# Altium PCB PCB1.PcbDoc
Units mm, origin at the board's own origin, x right, y up, seen from the top; angles counter-clockwise.
Board outline 95 x 70 mm, 2 copper layers (Top Layer, Bottom Layer); 91 components, 64 nets, 292 pads, 0 vias.
Unrouted connection lines stored in the file: 193.
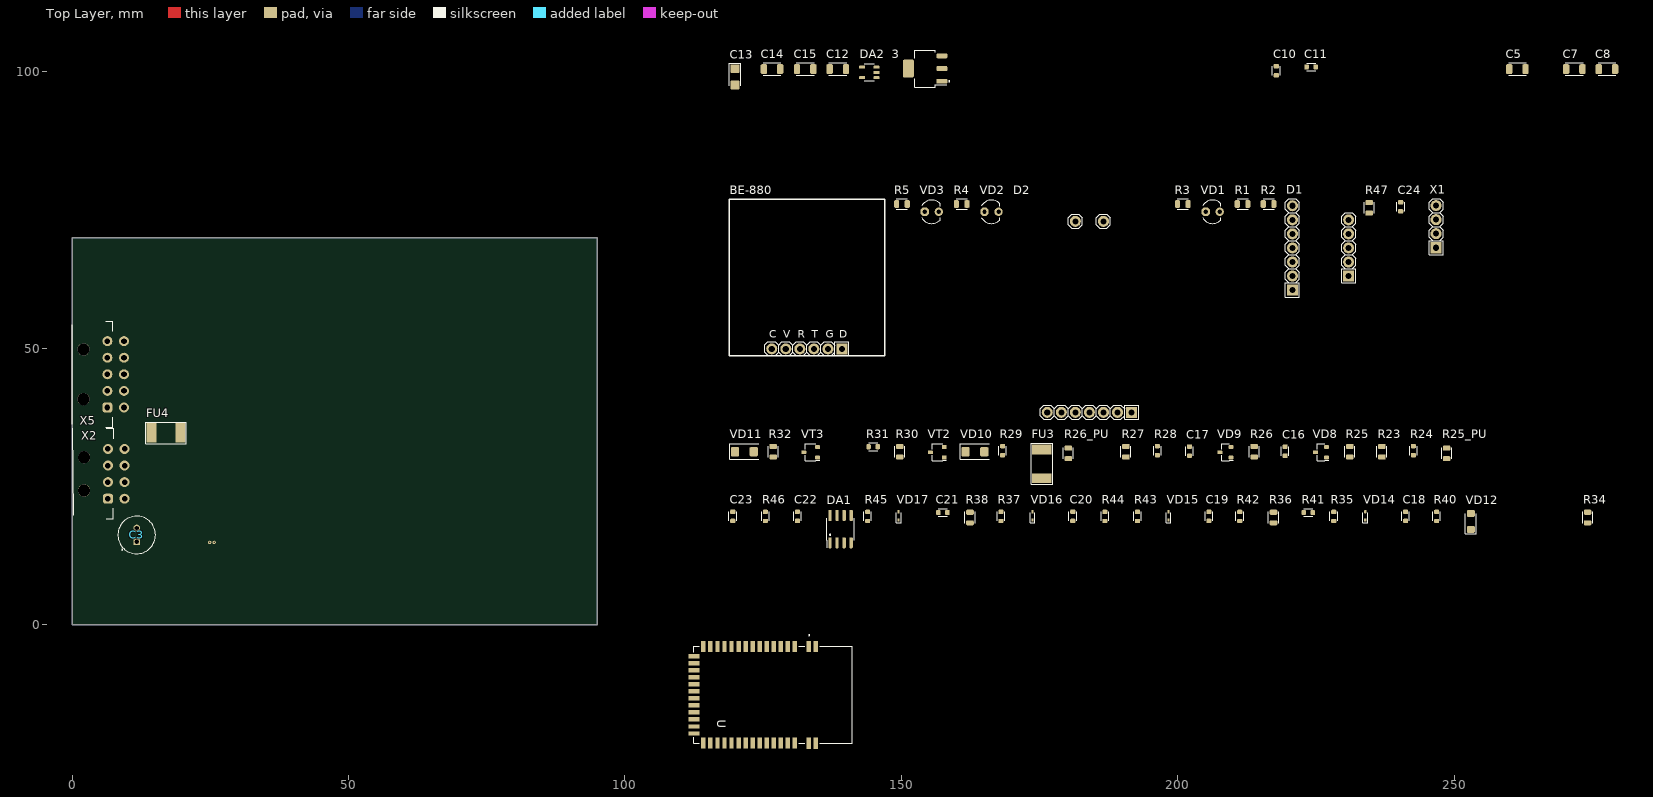
[diagram p0: Top Layer view]
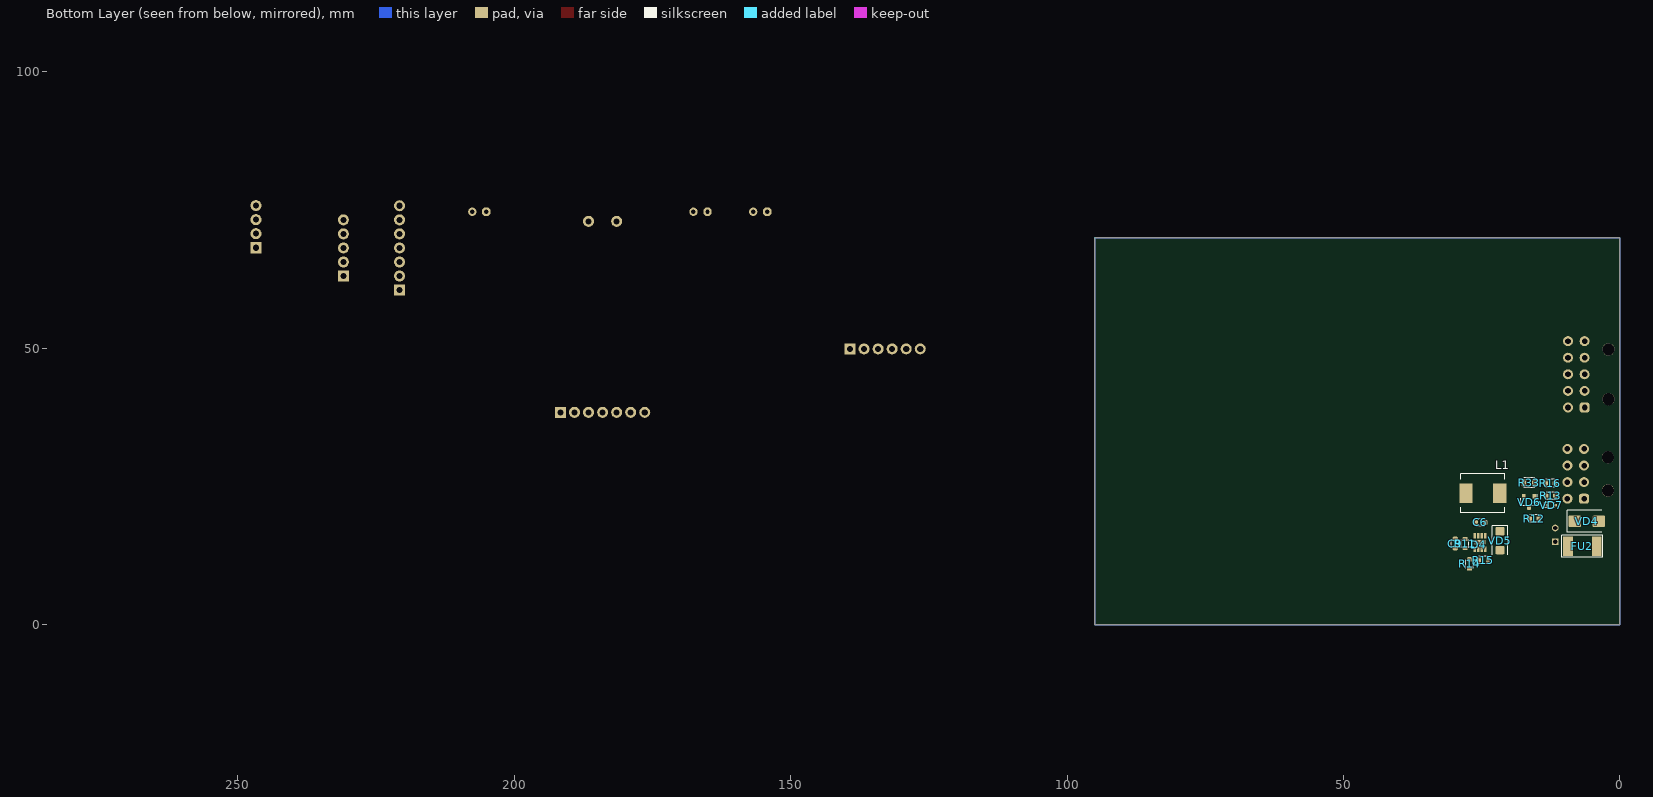
[diagram p1: Bottom Layer view, seen from below]

## Layer stack, top to bottom
Top Solder: solder mask 0.0102, Solder Resist, Dk 3.5
Top Layer: signal copper 0.0356
Dielectric 1: dielectric 0.32, FR-4, Dk 4.8
Bottom Layer: signal copper 0.0356
Bottom Solder: solder mask 0.0102, Solder Resist, Dk 3.5

## Board outline
0,0 0,70 95,70 95,0

## Design rules (kind name [scope] priority, off if disabled: settings)
Clearance "Clearance 3 Oz" [All] p1 off: gap=0.35 ignorepadtopadclearanceinfootprint=FALSE except(0.25: Arc-Hole Track-Hole SMDPad-Hole THPad-Hole Via-Hole Fill-Hole Poly-Hole Region-Hole Text-Hole)
Clearance "Clearance 2 Oz" [All] p2 off: gap=0.3 ignorepadtopadclearanceinfootprint=FALSE except(0.25: Arc-Hole Track-Hole SMDPad-Hole THPad-Hole Via-Hole Fill-Hole Poly-Hole Region-Hole Text-Hole)
Clearance "Clearance-1 1 Oz" [All] p3 off: gap=0.2 ignorepadtopadclearanceinfootprint=FALSE except(0.25: Arc-Hole Track-Hole SMDPad-Hole THPad-Hole Via-Hole Fill-Hole Poly-Hole Region-Hole Text-Hole) // Standart
Clearance "Clearance-2 1 Oz" [All] p4: gap=0.15 ignorepadtopadclearanceinfootprint=FALSE except(0.2: Arc-Fill Arc-Poly Track-Fill Track-Poly SMDPad-Fill SMDPad-Poly THPad-Fill THPad-Poly Via-Fill Via-Poly Fill-Fill Fill-Poly Poly-Poly; 0.25: Arc-Hole Track-Hole SMDPad-Hole THPad-Hole Via-Hole Fill-Hole Poly-Hole Region-Hole Text-Hole) // Advance
Clearance "Clearance-1 1/2 Oz" [All] p5 off: gap=0.125 ignorepadtopadclearanceinfootprint=FALSE except(0.2: Arc-Fill Arc-Poly Track-Fill Track-Poly SMDPad-SMDPad SMDPad-Fill SMDPad-Poly THPad-Fill THPad-Poly Via-Fill Via-Poly Fill-Fill Fill-Poly Poly-Poly Poly-Region Poly-Text; 0.25: Arc-Hole Track-Hole SMDPad-Hole THPad-Hole Via-Hole Fill-Hole Poly-Hole Region-Hole Text-Hole) // Standart
Clearance "Clearance-2 1/2 Oz" [All] p6 off: gap=0.1 ignorepadtopadclearanceinfootprint=FALSE except(0.15: Arc-Fill Arc-Poly Track-Fill Track-Poly SMDPad-SMDPad SMDPad-Fill SMDPad-Poly THPad-Fill THPad-Poly Via-Fill Via-Poly Fill-Fill Fill-Poly Poly-Poly Poly-Region Poly-Text; 0.25: Arc-Hole Track-Hole SMDPad-Hole THPad-Hole Via-Hole Fill-Hole Poly-Hole Region-Hole Text-Hole) // Advance
PolygonConnect [All] p1: connectstyle=Relief reliefconductorwidth=0.254 reliefentries=4 polygonreliefangle="90 Angle" airgapwidth=0.254
RoutingVias [All] p1: holewidth=0.711 width=1.27 viastyle="Through Hole" minholewidth=0.711 minwidth=1.27 maxholewidth=0.711 maxwidth=1.27
SilkToSilkClearance [All] p1 off: silktosilkclearance=0.254
SilkToSolderMaskClearance [IsPad] p1 off: minsilkscreentomaskgap=0.254 clearancetoexposedcopper=TRUE
SolderMaskExpansion [All] p1: expansion=0.102 istentingtop=FALSE
Width "Width 3 Oz" [All] p1 off: maxlimit=10 minlimit=0.35 preferedwidth=0.4 checkconnectedcopper=TRUE
Width "Width 2 Oz" [All] p2 off: maxlimit=10 minlimit=0.3 preferedwidth=0.35 minimp=50.000000 maximp=50.000000 favimp=50.000000 checkconnectedcopper=TRUE
Width "Width 1 Oz" [All] p3 off: maxlimit=10 minlimit=0.15 preferedwidth=0.2 checkconnectedcopper=TRUE
Width "Width 1/2 Oz" [All] p4: maxlimit=10 minlimit=0.1 preferedwidth=0.125 checkconnectedcopper=TRUE
28 further rules are at their usual default settings.

## Classes and differential pairs
component class RaceDAQ_POWER: 3 C3 C5 C6 C7 C8 C9 C10 C11 C12 C13 C14 C15 D4 DA2 FU2 L1 R11 R12 R13 R14 R15 R16 R33 VD4 VD5 VD6 VD7 X2
component class RaceDAQ_MCU: BE-880 C24 D1 D2 R1 R2 R3 R4 R5 R47 U VD1 VD2 VD3 X1
component class RaceDAQ_IN_OUT: C16 C17 FU3 FU4 R23 R24 R25 R25_PU R26 R26_PU R27 R28 R29 R30 R31 R32 VD8 VD9 VD10 VD11 VT2 VT3
component class RaceDAQ_ANALOG: C18 C19 C20 C21 C22 C23 DA1 R34 R35 R36 R37 R38 R40 R41 R42 R43 R44 R45 R46 VD12 VD14 VD15 VD16 VD17 X5

## Components (designator, comment, footprint, x,y, rotation, side; value= is the part's Value field where it differs from the comment)
3 "LM1117-3.3" SOT230P700X180-4L40N 154.3,100.6 r90 top
BE-880 "" GPS:BE880 132.9,49.9 r0 top
C3 "100uF" CAPPRD250W50D680H1250 11.7,16.25 r90 top
C5 "10uF" CAPC3216X130L50N 261.399,100.5 r0 top
C6 "0.1uF" CAPC1608X90L25N 25.225,18.5 r180 bottom
C7 "10uF" CAPC3216X130L50N 271.699,100.5 r0 top
C8 "10uF" CAPC3216X130L50N 277.599,100.5 r0 top
C9 "33пФ" CAPC1608X90L25N 29.8,14.7 r270 bottom
C10 "33пФ" CAPC1608X90L25N 217.8,100.2 r90 top
C11 "0.1uF" CAPC1608X90L25N 224.1,100.9 r0 top
C12 "10uF" CAPC3216X130L50N 138.5,100.5 r0 top
C13 "22uF" CAPPM3216X180 119.9,99.1 r90 top
C14 "10uF" CAPC3216X130L50N 126.6,100.5 r0 top
C15 "10uF" CAPC3216X130L50N 132.6,100.5 r0 top
C16 "4.7нФ" CAPC1608X90L25N 219.4,31.4 r90 top
C17 "4.7нФ" CAPC1608X90L25N 202.1,31.4 r90 top
C18 "0.1uF" CAPC1608X90L25N 241.199,19.6 r90 top
C19 "0.1uF" CAPC1608X90L25N 205.6,19.6 r90 top
C20 "0.1uF" CAPC1608X90L25N 181,19.6 r90 top
C21 "0.1uF" CAPC1608X90L25N 157.5,20.3 r0 top
C22 "0.1uF" CAPC1608X90L25N 131.2,19.6 r90 top
C23 "0.1uF" CAPC1608X90L25N 119.5,19.6 r90 top
C24 "0.1uF" CAPC1608X90L25N 240.299,75.6 r90 top
D1 "GY-LSM6DS3" AXL:LSM6DS3 225.8,68.8 r90 top
D2 "MCP2515_CAN" MDL:MCP2515 184,57.1 r90 top
D4 "DC/DC buck converter, input 4...60V, 2.1MHz, output 0.765...55V, 0.6A, -40...+125°C, SOT23-8" 8-SOT 25.3,14.9 r90 bottom
DA1 "MAX6675ISA+" SOIC127P600X175-8L87N 139,17.3 r0 top
DA2 "TPL803250-S5TR" SOT95P280X145-5L30N 144.2,99.9 r0 top
FU2 "JK-mSMD075-33" "FUSE: 1812" 6.8,14.2 r0 bottom
FU3 "JK-mSMD075-33" "FUSE: 1812" 175.4,29.1 r90 top
FU4 "JK-mSMD075-33" "FUSE: 1812" 17,34.7 r0 top
L1 "10мкГн" MPH0630 24.8,23.8 r0 bottom
R1 "5.1K" RESC2012X60L35N 211.7,76.1 r0 top
R2 "5.1K" RESC2012X60L35N 216.4,76.1 r0 top
R3 "820R" RESC2012X60L35N 200.9,76.1 r0 top
R4 "820R" RESC2012X60L35N 160.9,76.1 r0 top
R5 "820R" RESC2012X60L35N 150.1,76.1 r0 top
R11 "100K" RESC1608X55L25N 28,14.7 r270 bottom
R12 "100K" RESC1608X55L25N 15.5,19.2 r180 bottom
R13 "100K" RESC1608X55L25N 12.5,23.3 r0 bottom
R14 "12K" RESC1608X55L25N 27.2,11 r270 bottom
R15 "100K" RESC1608X55L25N 24.7,11.7 r180 bottom
R16 "33K" RESC1608X55L25N 12.6,25.6 r180 bottom
R23 "10K" RESC2012X60L35N 236.899,31.3 r90 top
R24 "1K" RESC1608X55L25N 242.599,31.5 r90 top
R25 "10K" RESC2012X60L35N 231.099,31.3 r90 top
R25_PU "10K" RESC2012X60L35N 248.599,31 r90 top
R26 "10K" RESC2012X60L35N 213.8,31.3 r90 top
R26_PU "10K" RESC2012X60L35N 180.2,31 r90 top
R27 "10K" RESC2012X60L35N 190.6,31.3 r90 top
R28 "1K" RESC1608X55L25N 196.3,31.5 r90 top
R29 "1K" RESC1608X55L25N 168.3,31.5 r90 top
R30 "10K" RESC2012X60L35N 149.7,31.3 r90 top
R31 "1K" RESC1608X55L25N 144.9,32.2 r0 top
R32 "10K" RESC2012X60L35N 126.8,31.3 r90 top
R33 "10K" RESC2012X60L35N 16.4,25.7 r180 bottom
R34 "0" RESC2012X60L35N 274.099,19.4 r90 top
R35 "1K 0.1%" RESC1608X55L25N 228.2,19.6 r90 top
R36 "10K" RESC2012X60L35N 217.3,19.4 r90 top
R37 "1K 0.1%" RESC1608X55L25N 168,19.6 r90 top
R38 "10K" RESC2012X60L35N 162.4,19.4 r90 top
R40 "1Ом" RESC1608X55L25N 246.799,19.6 r90 top
R41 "5.1K 0.1%" RESC1608X55L25N 223.6,20.3 r0 top
R42 "10K 0.1%" RESC1608X55L25N 211.2,19.6 r90 top
R43 "10K 0.1%" RESC1608X55L25N 192.7,19.6 r90 top
R44 "5.1K 0.1%" RESC1608X55L25N 186.8,19.6 r90 top
R45 "22Ом" RESC1608X55L25N 143.9,19.6 r90 top
R46 "22Ом" RESC1608X55L25N 125.4,19.6 r90 top
R47 "10K" RESC2012X60L35N 234.599,75.4 r90 top
U "E73-2G4M04S1B" XCVR_E73-2G4M04S1B 126.8,-12.675 r270 top
VD1 "LED, Green, *, *, *, -55...+150°C" "DIODE: LED3MM_Y" 206.3,74.7 r0 top
VD2 "LED, Green, *, *, *, -55...+150°C" "DIODE: LED3MM_Y" 166.3,74.7 r0 top
VD3 "LED, Green, *, *, *, -55...+150°C" "DIODE: LED3MM_Y" 155.5,74.7 r0 top
VD4 "SS14" DIOM5436X247N 6,18.7 r180 bottom
VD5 "SMAJ15-A" DIOM5126X229 21.7,15.2 r270 bottom
VD6 "BAT54C" SOT95P240X110-3L16 16.45,22.2 r90 bottom
VD7 "PESD3V3L1B" SODFL1608X65N 12.4,21.6 r180 bottom
VD8 "BAT54S" SOT95P240X110-3L16 225.9,31.2 r0 top
VD9 "BAT54S" SOT95P240X110-3L16 208.6,31.2 r0 top
VD10 "SMAJ24CA" DIOM5126X229 163.3,31.3 r0 top
VD11 "SMAJ24CA" DIOM5126X229 121.6,31.3 r0 top
VD12 "SMF5.0A" SODFL3617X110 252.999,18.7 r90 top
VD14 "PESD3V3L1B" SODFL1608X65N 233.899,19.7 r90 top
VD15 "PESD3V3L1B" SODFL1608X65N 198.3,19.7 r90 top
VD16 "PESD3V3L1B" SODFL1608X65N 173.7,19.7 r90 top
VD17 "PESD3V3L1B" SODFL1608X65N 149.5,19.7 r90 top
VT2 "WM10N33M" SOT95P240X110-3L10 156.5,31.2 r0 top
VT3 "WM10N33M" SOT95P240X110-3L10 133.6,31.2 r0 top
X1 "Connector, 4pin, 2.54mm, 500VAC, 3A" "CON: PLS-4" 246.699,72 r90 top
X2 "43045-0800" 43045-0800 2.18,28.8 r270 top
X5 "43045-1000 (Micro-Fit 2x5 RA)" 43045-1000 2.08,45.3 r270 top

## Footprints (in the part's own frame and the unit in brackets; to place one, negate y for a bottom-side part, rotate by r counter-clockwise, add the part's x,y. Pads: shape width x height; smd on the part's side, far side on the other; paste and mask are expansions set on the pad)
8-SOT [mm] "3x2 mm, pitch 0.65 mm, power pad"
  round 0.6 hole 0.3: 0(0,-0.4) 0(0,0.4)
  rect 0.8x2 smd: 0(0,0)
  rect 1x0.45 smd mask+0.05: 1(-1.2,0.975) 2(-1.2,0.325) 3(-1.2,-0.325) 4(-1.2,-0.975) 5(1.2,-0.975) 6(1.2,-0.325) 7(1.2,0.325) 8(1.2,0.975)
  round 0.5 on Mech1: ""(-2.1,1.45)
  round 0.5 on Bottom Overlay: ""(-2.1,1.45)
  body extent -1.4,-1.45 1.4,1.45, height 1
43045-0800 [mm] "43045-0800"
  round 2.2 hole 2.2 unplated: 0(-1.5,0) 0(4.5,0)
  rrect50% 1.8x1.8 hole 1: 1(6,4.32)
  round 1.8 hole 1: 2(3,4.32) 3(0,4.32) 4(-3,4.32) 5(6,7.32) 6(3,7.32) 7(0,7.32) 8(-3,7.32)
  silkscreen extent -6.7,-2.1 9.6,5.33, body extent -6.58,-4.6 9.58,7.64, height 8.76
43045-1000 [mm] "43045-1200"
  round 2.2 hole 2.2 unplated: 0(-4.5,0) 0(4.5,0)
  rrect50% 1.8x1.8 hole 1: 1(6,4.32)
  round 1.8 hole 1: 2(3,4.32) 3(0,4.32) 4(-3,4.32) 5(-6,4.32) 6(6,7.32) 7(3,7.32) 8(0,7.32) 9(-3,7.32) 10(-6,7.32)
  silkscreen extent -9.6,-2 9.6,5.31, body extent -9.58,-4.6 9.57,7.64, height 8.83
AXL:LSM6DS3 [mm]
  rect 2x2 hole 1.1: 1(-8.255,5.08) 12(-5.715,-5.08)
  round 2 hole 1.1: 2(-5.715,5.08) 3(-3.175,5.08) 4(-0.635,5.08) 5(1.905,5.08) 6(4.445,5.08) 7(6.985,5.08) 8(4.445,-5.08) 9(1.905,-5.08) 10(-0.635,-5.08) 11(-3.175,-5.08)
  silkscreen extent -9.53,-6.35 8.25,6.35, body extent -9.63,-6.52 8.37,6.48, height 8.54
CAPC1608X90L25N [mm] "Capacitor, Chip; 1.60 mm L X 0.80 mm W X 0.90 mm H body"
  rrect51% 0.82x0.93 smd: 1(-0.825,0) 2(0.825,0)
  silkscreen extent -0.8,-0.69 0.8,0.69, body extent -0.8,-0.4 0.8,0.4, height 0.9
CAPC3216X130L50N [mm] "Capacitor, Chip; 3.20 mm L X 1.60 mm W X 1.30 mm H body"
  rrect43% 1.16x1.77 smd: 1(-1.475,0) 2(1.475,0)
  silkscreen extent -1.6,-1.11 1.6,1.11, body extent -1.6,-0.8 1.6,0.8, height 1.3
CAPPM3216X180 [mm] "Capacitor, Polarized, Molded Body; 3.20 mm L X 1.60 mm W X 1.80 mm H body"
  rrect31% 1.6x1.7 smd paste-0.05: 1(1.475,0) 2(-1.475,0)
  silkscreen extent -1.58,-1.05 2.48,1.06, body extent -1.6,-0.8 1.6,0.8, height 1.8
CAPPRD250W50D680H1250 [mm] "Capacitor, Polarized, Radial (Electrolytic); 2.50 mm C X 6.80 mm Dia X 12.50 mm H body"
  rect 1.2x1.2 hole 0.8 paste-1.2: 1(-1.25,0)
  round 1.2 hole 0.8 paste-1.2: 2(1.25,0)
  silkscreen extent -3.4,-3.4 3.4,3.4, body extent -3.4,-3.4 3.41,3.4, height 12.51
"CON: PLS-4" [mm] "PLS-40 4 pin header"
  rect 2x2 hole 1.1: 1(-3.81,0)
  round 2 hole 1.1: 2(-1.27,0) 3(1.27,0) 4(3.81,0)
  silkscreen extent -5.08,-1.27 5.08,1.27, body extent -5.08,-1.27 5.08,1.27, height 8.54
"DIODE: LED3MM_Y" [mm] "Yellow Leaded Led, 3 mm"
  oct 1.5x1.5 hole 0.8: 1(-1.27,0)
  round 1.5 hole 0.8: 2(1.27,0)
  silkscreen extent -1.82,-2.13 1.48,2.1, body extent -2,-2 2,2, height 12
DIOM5126X229 [mm] "Diode, Molded Body; 5.105 mm L X 2.665 mm W X 2.29 mm H body"
  rrect33% 1.52x1.68 smd: A(1.7,0) C(-1.7,0)
  silkscreen extent -2.69,-1.4 2.56,1.4, body extent -2.55,-1.33 2.55,1.33, height 2.29
DIOM5436X247N [mm] "Diode, Molded Body; 5.405 mm L X 3.625 mm W X 2.47 mm H body"
  rrect24% 2.25x2.12 smd: A(2.185,0) C(-2.185,0)
  silkscreen extent -3.53,-1.98 2.71,1.98, body extent -2.7,-1.81 2.7,1.81, height 2.47
"FUSE: 1812" [mm]
  rect 1.78x3.5 smd: 1(-2.6,0) 2(2.6,0)
  silkscreen extent -3.7,-1.95 3.7,1.95, body extent -2.41,-1.61 2.41,1.61, height 1.32
GPS:BE880 [mm]
  rect 2x2 hole 1.1: 1(6.35,0)
  round 2 hole 1.1: 2(3.81,0) 3(1.27,0) 4(-1.27,0) 5(-3.81,0) 6(-6.35,0)
  silkscreen extent -14.02,-1.27 14.12,27.1, body extent -14,-1.27 14,27.06, height 11.5
MDL:MCP2515 [mm]
  round 2 hole 1.1: 1(-18.669,7.62) 2(-18.669,5.08) 3(-18.669,2.54) 4(-18.669,0) 5(-18.669,-2.54) 6(-18.669,-5.08) 8(15.875,-2.54) 9(15.875,2.54)
  rect 2x2 hole 1.1: 7(-18.669,-7.62)
  silkscreen extent -19.94,-8.89 17.14,8.89, body extent -20,-14 20,14, height 10.66
MPH0630 [mm] "Inductor, Dual Flat No-Lead (DFN 2 Pin); 2 pin, 9.80 mm L X 8.90 mm W X 5.00 mm H body"
  rect 2.4x3.5 smd: 1(-3.05,0) 2(3.05,0)
  silkscreen extent -4,-3.5 4,3.5, body extent -3.5,-3.3 3.5,3.3, height 3
RESC1608X55L25N [mm] "Resistor, Chip; 1.60 mm L X 0.80 mm W X 0.55 mm H body"
  rrect51% 0.79x0.93 smd: 1(-0.82,0) 2(0.82,0)
  silkscreen extent -0.8,-0.69 0.8,0.69, body extent -0.8,-0.4 0.8,0.4, height 0.55
RESC2012X60L35N [mm] "Resistor, Chip; 2.00 mm L X 1.25 mm W X 0.60 mm H body"
  rrect50% 0.92x1.38 smd: 1(-0.955,0) 2(0.955,0)
  silkscreen extent -1,-0.91 1,0.91, body extent -1,-0.63 1,0.63, height 0.6
SODFL1608X65N [mm] "Small Outline Diode Flat Lead (SODFL); 1.20 mm L X 0.80 mm W X 0.65 mm H body"
  rrect50% 0.6x0.4 smd: A(0.75,0) C(-0.75,0)
  silkscreen extent -1.28,-0.43 0.6,0.43, body extent -0.8,-0.4 0.8,0.4, height 0.65
SODFL3617X110 [mm] "Small Outline Diode Flat Lead (SODFL); 2.70 mm L X 1.75 mm W X 1.10 mm H body"
  rrect38% 1.3x1.4 smd: A(1.45,0) C(-1.45,0)
  silkscreen extent -2.28,-1 1.35,1, body extent -1.83,-0.87 1.83,0.87, height 1.1
SOIC127P600X175-8L87N [mm] "Small Outline IC (SOIC), 1.27 mm pitch; 8 pin, 4.90 mm L X 3.90 mm W X 1.75 mm H body"
  rrect50% 0.6x1.97 smd: 1(-1.905,-2.475) 2(-0.635,-2.475) 3(0.635,-2.475) 4(1.905,-2.475) 5(1.905,2.475) 6(0.635,2.475) 7(-0.635,2.475) 8(-1.905,2.475)
  silkscreen extent -2.5,-3.38 2.5,2, body extent -2.45,-3 2.45,3, height 1.75
SOT95P240X110-3L10 [mm] "Small Outline Transistor (SOT23), 0.95 mm pitch; 3 pin, 2.90 mm L X 1.80 mm W X 1.10 mm H body"
  rrect51% 0.9x0.7 smd mask+0.05: 1(1.25,-0.95) 2(1.25,0.95) 3(-1.25,0)
  silkscreen extent -0.95,-1.5 1.64,1.5, body extent -1.2,-1.45 1.2,1.45, height 0.91
SOT95P240X110-3L16 [mm] "Small Outline Transistor (SOT23), 0.95 mm pitch; 3 pin, 2.90 mm L X 1.30 mm W X 1.10 mm H body"
  rrect51% 0.9x0.7 smd: 1(1,-0.95) 2(1,0.95) 3(-1,0)
  silkscreen extent -0.7,-1.5 1.39,1.5, body extent -1.2,-1.45 1.2,1.45, height 1.1
SOT95P280X145-5L30N [mm] "Small Outline Transistor (SOT23), 0.95 mm pitch; 5 pin, 2.90 mm L X 1.60 mm W X 1.45 mm H body"
  rrect50% 1.1x0.55 smd paste-0.05 mask+0.06: 1(1.3,-0.95) 2(1.3,0) 3(1.3,0.95) 4(-1.3,0.95) 5(-1.3,-0.95)
  silkscreen extent -0.88,-1.53 0.88,1.53, body extent -1.4,-1.45 1.4,1.45, height 1.45
SOT230P700X180-4L40N [mm] "Small Outline Transistor (SOT223), 2.30 mm pitch; 4 pin, 6.50 mm L X 3.50 mm W X 1.80 mm H body"
  rrect49% 0.89x1.97 smd: 1(-2.3,-3.025) 2(0,-3.025) 3(2.3,-3.025)
  rrect22% 3.19x1.97 smd: 4(0,3.025)
  silkscreen extent -3.35,-4.46 3.35,1.85, body extent -3.25,-3.5 3.25,3.5, height 1.8
XCVR_E73-2G4M04S1B [mm]
  rect 2x0.8 smd: 0(-8.75,7.715) 1(-8.75,6.445) 2(-8.73,3.905) 3(-8.73,2.635) 4(-8.73,1.365) 5(-8.73,0.095) 6(-8.73,-1.175) 7(-8.73,-2.445) 8(-8.73,-3.715) 9(-8.73,-4.985) 10(-8.73,-6.255) 11(-8.73,-7.525) 12(-8.73,-8.795) 13(-8.73,-10.065) 14(-8.73,-11.335) 15(-8.73,-12.605) 28(8.73,-12.605) 29(8.73,-11.335) 30(8.73,-10.065) 31(8.73,-8.795) 32(8.73,-7.525) 33(8.73,-6.255) 34(8.73,-4.985) 35(8.73,-3.715) 36(8.73,-2.445) 37(8.73,-1.175) 38(8.73,0.095) 39(8.73,1.365) 40(8.73,2.635) 41(8.73,3.905) 42(8.75,6.445) 43(8.75,7.715)
  rect 0.8x2 smd: 16(-6.985,-14.35) 17(-5.715,-14.35) 18(-4.445,-14.35) 19(-3.175,-14.35) 20(-1.905,-14.35) 21(-0.635,-14.35) 22(0.635,-14.35) 23(1.905,-14.35) 24(3.175,-14.35) 25(4.445,-14.35) 26(5.715,-14.35) 27(6.985,-14.35)
  silkscreen extent -10.9,-14.35 8.75,14.35, body extent -8.76,-14.35 8.74,14.35, height 2.54

## Part data
BE-880: library part BE-880, "Gate driver", CurrentOutput=±2A, Frequency=1MHz, Temperature=-40...+150°C, VoltageSupply="supply -12...+20V", VoltageWork=1200V, CMTI=100kV/μs
C3: library part "Radial 6.3x11", PartNumber=EEUFR1E101, Voltage=25V, Type="Radial 6.3x11"
C5 C7 C8 C12 C14 C15: library part C1206, PartNumber=GRM31CR61E106KA12L, Voltage=25V, Type=C1206
C6 C11 C18 C19 C20 C21 C22 C23 C24: library part C0603, PartNumber=CL10B104KB8NNNC, Voltage=50V, Type=C0603
C9 C10: library part C0603, PartNumber=CL10C330JB8NNNC,, Voltage=50V, Type=C0603
C13: library part CASEA, PartNumber=293D226X9010A2TE3, Type=CASEA
C16 C17: library part C0603, Type=C0603
D2: library part MCP2515_Mod
D4: library part SQ20953AIC, "Buck converter", CurrentOutput=0.6A, Frequency=2.1MHz, Manufacturer=Silergy, Package=SOT23-8, Temperature=-40...+125°C, VoltageInput="input 4...60V", VoltageOutput="output 0.765...55V", ComponentType="DC/DC buck converter", HelpURL=https://www.chipdip.ru/product/sq20953aic-silergy-8027122657, PartNumber=SQ20953AIC, ValueManufacturerPartNumber="DC/DC buck converter, input 4...60V, 2.1MHz, output 0.765...55V, 0.6A, -40...+125°C, SOT23-8"
DA2: library part TPS763xx, Type=TPL803225-S5TR-S
FU2 FU3 FU4: "Предохраниетель ток срабатывания 1,5А, ток удержания 750мА", Current=1.5A, Manuf=JINRUI
L1: library part MPH0630, PartNumber=MWSA0603S-100MT, Type=MPH0630
R1 R2 R3 R4 R5 R23 R25 R25_PU R26 R26_PU R27 R30 R32 R33 R34 R36 R38 R47: library part R0805, Type=R0805
R11 R12 R13 R15: library part R0603, PartNumber=RC0603FR-07100KL, Type=R0603
R14: library part R0603, PartNumber=RC0603FR-0712KL, Type=R0603
R16: library part R0603, PartNumber=RC0603FR-0733KL, Type=R0603
R24 R28 R29 R31 R45 R46: library part R0603, Type=R0603
R35 R37 R40: library part R0603, PartNumber=RT0603BRD071KL, Type=R0603
R41 R44: library part R0603, PartNumber=RT0603BRD075K1L, Type=R0603
R42 R43: library part R0603, PartNumber=RT0603BRD0710KL, Type=R0603
U: "nRF52832 BLE 4.2/5.0 SMD Wireless Module", Package=Package, Availability=Unavailable, MF=EBYTE, MP=E73-2G4M04S1B, Price=None, SnapEDA_Link=https://www.snapeda.com/parts/E73-2G4M04S1B/EBYTE/view-part/4219264/?ref=snap
VD1: library part LED_single_3mm, Color=Зеленый, ColorParameter=Green, Temperature=-55...+150°C, TypeDiode=LED, ValueManufacturerPartNumber="LED, Green, *, *, *, -55...+150°C"
VD2: library part LED_single_3mm, Color=Желый, ColorParameter=Green, Temperature=-55...+150°C, TypeDiode=LED, ValueManufacturerPartNumber="LED, Green, *, *, *, -55...+150°C"
VD3: library part LED_single_3mm, Color=Красный, ColorParameter=Green, Temperature=-55...+150°C, TypeDiode=LED, ValueManufacturerPartNumber="LED, Green, *, *, *, -55...+150°C"
VD4: library part SS26T3G, Type=SS26T3G
VD5: library part SMAJ-A, Type=SMAJ-A
VD6: library part BAT54, Type=BAT54
VD7 VD14 VD15 VD16 VD17: library part PESDxS1UB, Type=PESDxS1UB
VD10 VD11: library part SMAJ-CA, Type=SMAJ-CA
VD12: library part SMFxxA, Type=SMFxxA
VT2 VT3: library part AO3400, Type=AO3400
X1: library part PLS-4, CurrentMax=3A, Manufacturer=Connfly, VoltageMax=500VAC, CommentText="\"Разъем\"", HelpURL=https://www.chipdip.ru/product/pls-4, Multichannel=4pin, PartNumber=PLS-4, Pitch=2.54mm, TypeConnector=Connector, ValueManufacturerPartNumber="Connector, 4pin, 2.54mm, 500VAC, 3A"
X5: library part 43045-1000, Type=43045-1000
3: Type=LM1117-3.3
DA1: Type=MAX6675ISA+
VD8 VD9: Type=BAT54S
X2: Type=43045-0800

## Nets (pads, with @x,y where several pads share a name; then routed paths per layer and width w, separated by ;. In a path a pad name is that pad's centre, name@x,y a point inside that pad or via, vN(x,y) a via of type N, cw(c..) or ccw(c..) an arc to the next point about the centre after c; other vN are vias at no path point)
3,3V: 3.2 BE-880.5 C13.1 C23.2 C24.2 D1.1 D1.2 D1.6 D2.7 DA1.4 R1.2 R2.2 R3.1 R4.1 R5.1 R25_PU.1 R26_PU.1 R35.2 R37.2 R47.1 VD8.2 VD9.2 X1.1
5.6V: 3.3 C7.1 C8.1 C9.1 C10.1 C11.1 C12.1 C14.1 DA2.1 DA2.3 L1.2 R11.1
5V: C15.1 DA2.5 R40.2 VD12.C
AGND: C18.2 C19.1 C20.1 C21.1 C22.2 C23.1 DA1.1 DA1.2 R34.2 R42.1 R43.1 R45.2 VD14.A VD16.A X5.6
GND: 3.1 BE-880.2 C3.2 C5.2 C7.2 C8.2 C10.2 C11.2 C12.2 C13.2 C14.2 C15.2 C16.1 C17.2 C24.1 D1.5 D2.6 D4.3 D4.4 DA2.2 R12.2 R14.2 R15.2 R16.2 R25.2 R26.1 R30.1 R32.1 R34.1 U.15 U.42 U.43 VD3.2 VD5.A VD7.A VD8.1 VD9.1 VD10.A VD11.A VD12.A VD15.A VD17.A VT2.2 VT3.2 X1.2 X2.5 X2.6
NetBE-880_3: BE-880.3 U.23
NetBE-880_4: BE-880.4 U.21
NetC3_1: C3.1 C5.1 D4.5 FU2.2 VD5.C
NetC6_1: C6.1 D4.7
NetC6_2: C6.2 D4.6 L1.1
NetC9_2: C9.2 D4.1 R11.2 R14.1
NetC16_2: C16.2 R23.2 R24.1 R25.1 R25_PU.2 VD8.3
NetC17_1: C17.1 R26.2 R26_PU.2 R27.2 R28.1 VD9.3
NetC18_1: C18.1 R41.2 R42.2 U.19 VD14.C
NetC19_2: C19.2 R36.2 U.17
NetC20_2: C20.2 R43.2 R44.2 U.20 VD16.C
NetC21_2: C21.2 R38.2 U.18
NetC22_1: C22.1 DA1.3 R46.2
NetD1_3: D1.3 R2.1 U.5
NetD1_4: D1.4 R1.1 U.6
NetD1_10: D1.10 U.7
NetD2_1: D2.1 U.40
NetD2_2: D2.2 DA1.5 U.27
NetD2_3: D2.3 U.28
NetD2_4: D2.4 DA1.7 U.29
NetD2_5: D2.5 U.39
NetD2_8: D2.8 X5.7
NetD2_9: D2.9 X5.2
NetD4_2: D4.2 R15.1
NetD4_8: D4.8 R12.1 VD6.3
NetDA1_6: DA1.6 U.31
NetFU2_1: FU2.1 VD4.C
NetFU3_1: FU3.1 X2.3
NetFU3_2: FU3.2 VD10.C VT2.3
NetFU4_1: FU4.1 X2.4
NetFU4_2: FU4.2 VD11.C VT3.3
NetR3_2: R3.2 VD1.1
NetR4_2: R4.2 VD2.1
NetR5_2: R5.2 VD3.1
NetR13_1: R13.1 X2.2
NetR13_2: R13.2 R16.1 R33.2 VD6.1 VD7.C
NetR23_1: R23.1 X2.7
NetR24_2: R24.2 U.26
NetR27_1: R27.1 X2.8
NetR28_2: R28.2 U.24
NetR29_1: R29.1 R30.2 VT2.1
NetR29_2: R29.2 U.41
NetR31_1: R31.1 R32.2 VT3.1
NetR31_2: R31.2 U.33
NetR33_1: R33.1 U.8
NetR35_1: R35.1 R36.1 VD15.C X5.3
NetR37_1: R37.1 R38.1 VD17.C X5.8
NetR40_1: R40.1 X5.1
NetR41_1: R41.1 X5.4
NetR44_1: R44.1 X5.9
NetR45_1: R45.1 X5.10
NetR46_1: R46.1 X5.5
NetR47_2: R47.2 U.36
NetU_22: U.22 VD2.2
NetU_30: U.30 VD6.2
NetU_37: U.37 X1.3
NetU_38: U.38 X1.4
NetVD1_2: VD1.2
NetVD4_A: VD4.A X2.1
pads on no net: 3.4 BE-880.1 BE-880.6 D1.7 D1.8 D1.9 D1.11 D1.12 D4. D4.0 DA1.8 DA2.4 U.0 U.1 U.2 U.3 U.4 U.9 U.10 U.11 U.12 U.13 U.14 U.16 U.25 U.32 U.34 U.35 X2.0 X5.0
copper on no net: | length 330
  Bottom Layer w0.254: 0,0 0,70 95,70 95,0 0,0

## Text inside footprints (layer, text, board x,y; h text height)
BE-880: Top Overlay "V" at 128.624,51.881 h1.4; Top Overlay "R" at 131.213,51.906 h1.4; Top Overlay "T" at 133.753,51.881 h1.4; Top Overlay "G" at 136.293,51.881 h1.4; Top Overlay "D" at 138.792,51.906 h1.4; Top Overlay "C" at 126.133,51.881 h1.4